# Altium PCB PCB2.PcbDoc
Units mil, origin at the board's own origin, x right, y up, seen from the top; angles counter-clockwise.
Board outline 6000 x 4000 mil, 2 copper layers (Top Layer, Bottom Layer); 69 components, 66 nets, 372 pads, 77 vias.
Unrouted connection lines stored in the file: 2.
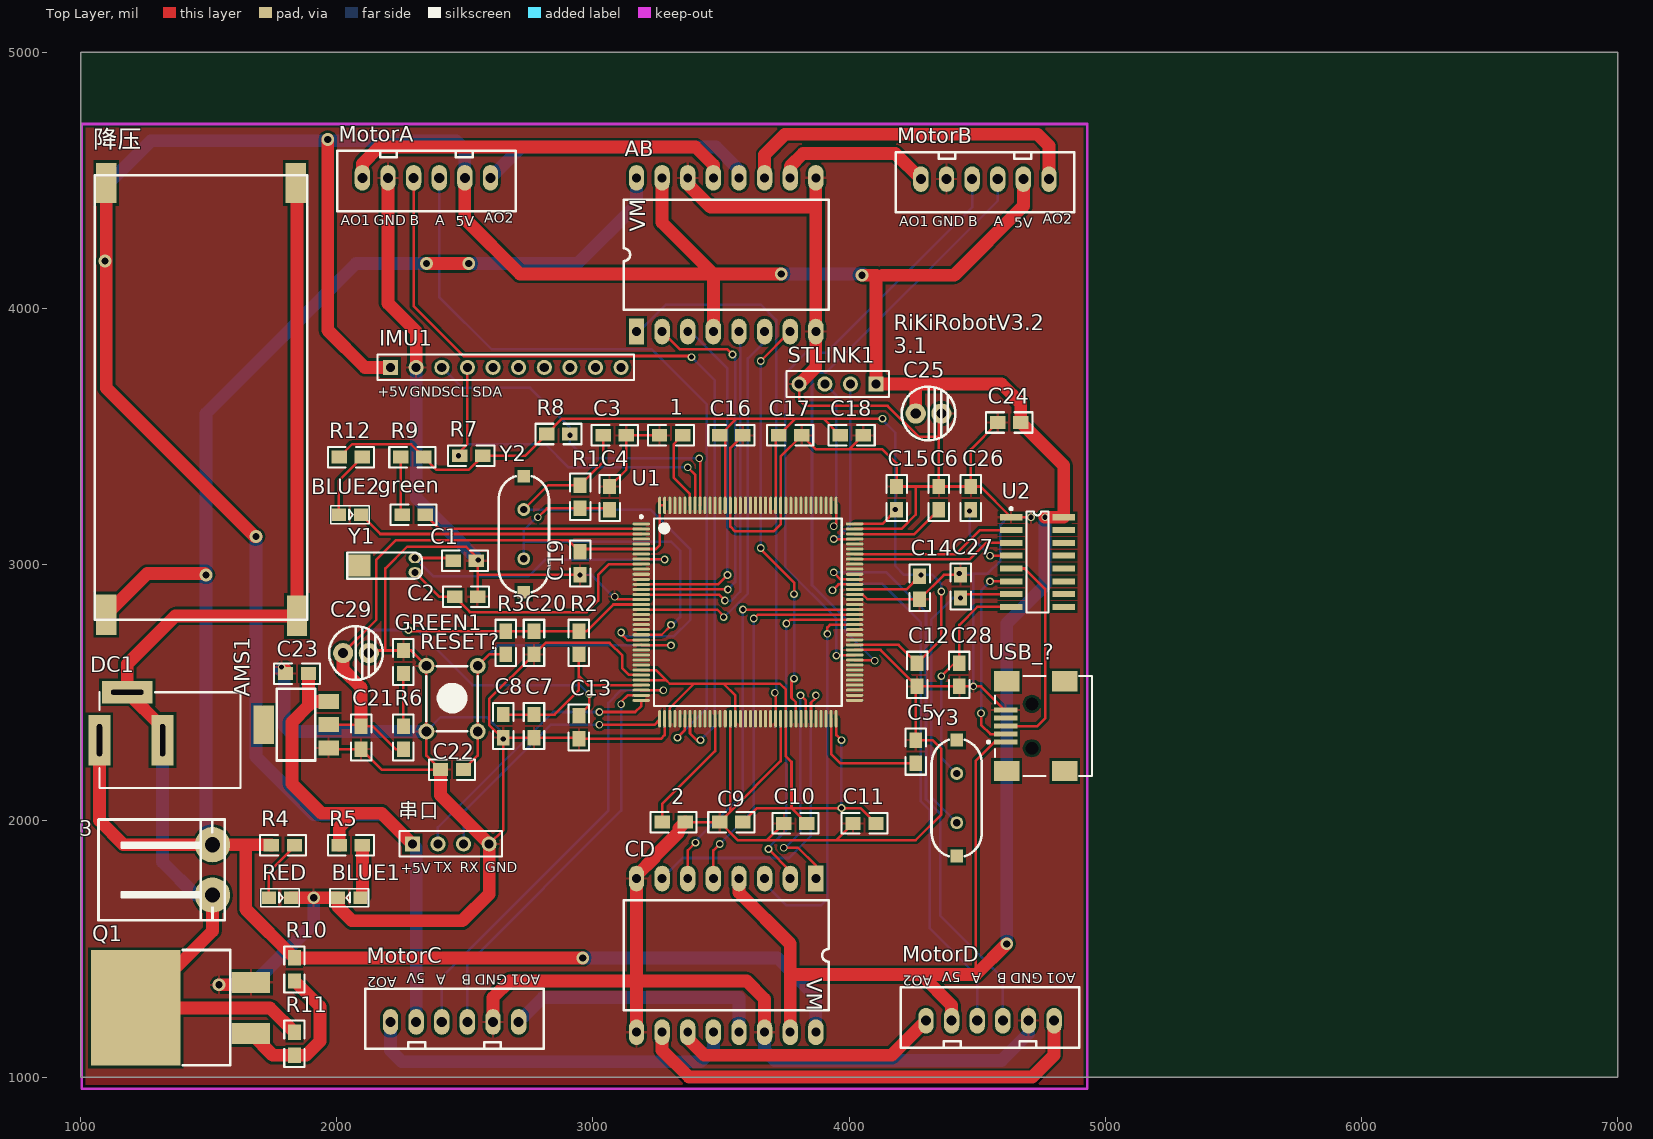
[diagram p0: Top Layer view]
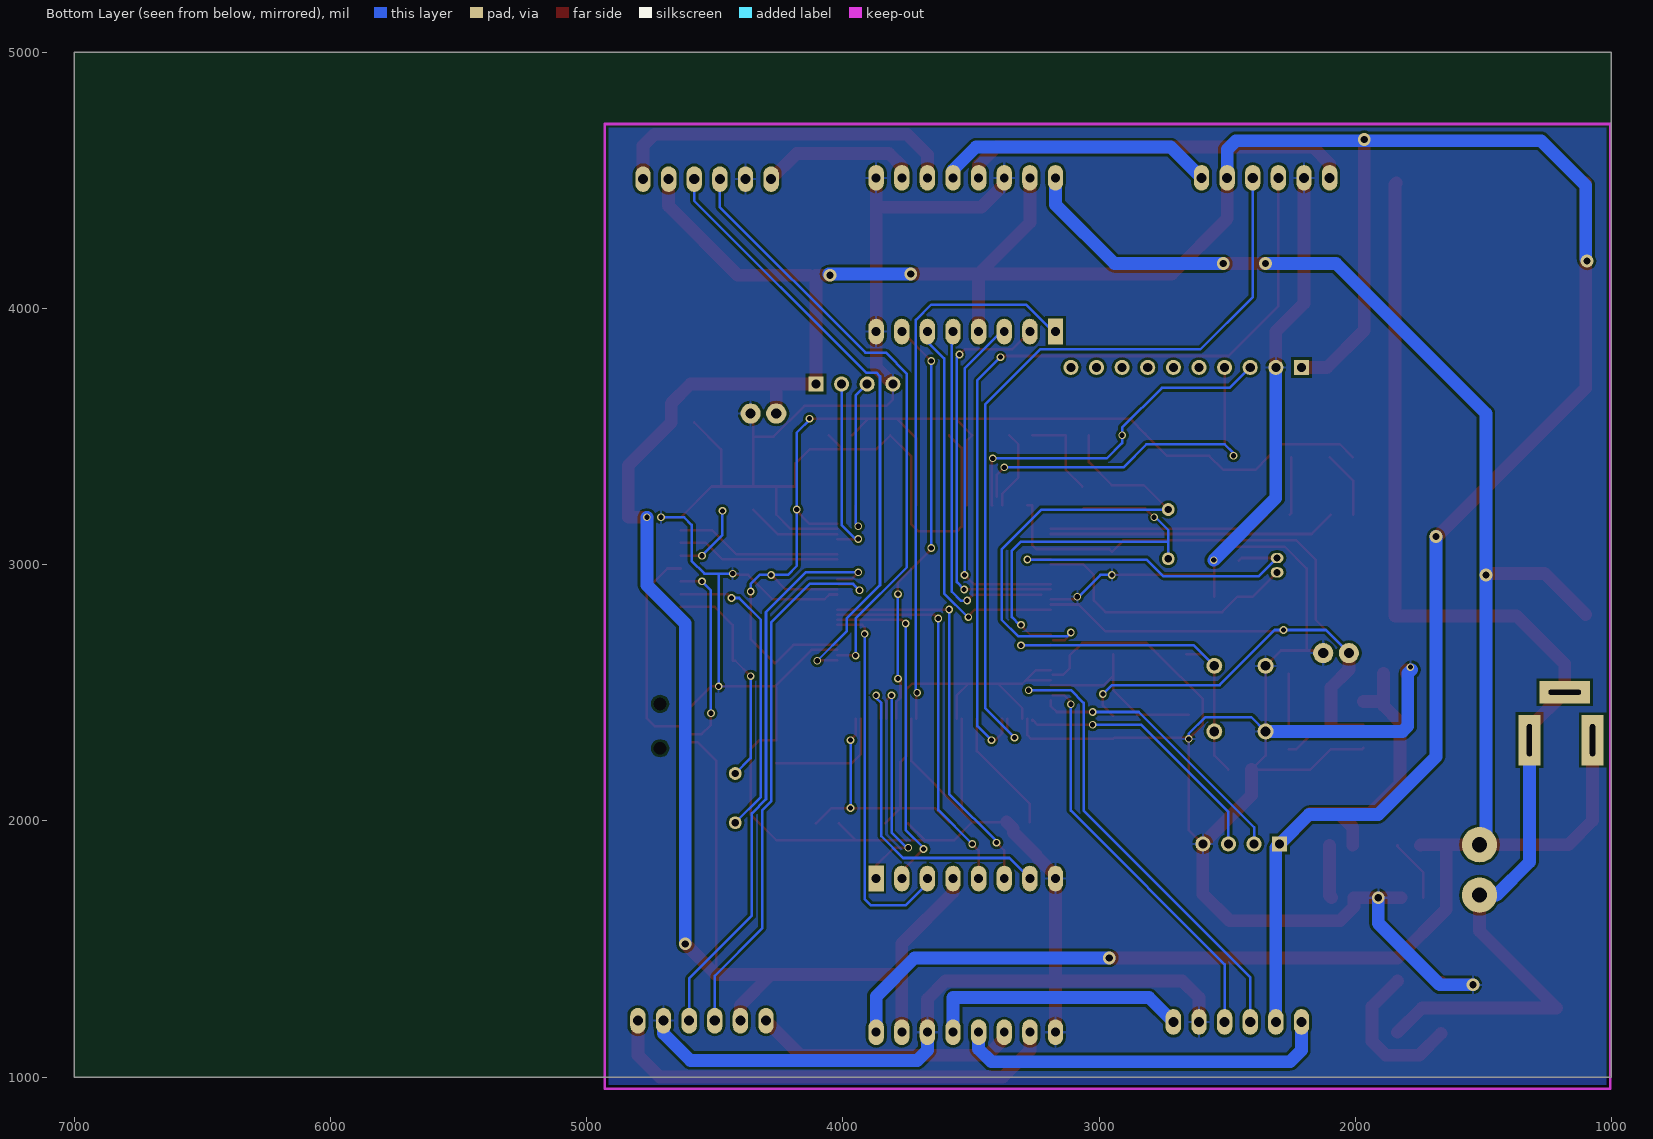
[diagram p1: Bottom Layer view, seen from below]

## Layer stack, top to bottom
Top Solder: solder mask 0.4, Solder Resist, Dk 3.5
Top Layer: signal copper 1.4
Dielectric 1: dielectric 12.6, FR-4, Dk 4.8
Bottom Layer: signal copper 1.4
Bottom Solder: solder mask 0.4, Solder Resist, Dk 3.5

## Board outline
1000,1000 7000,1000 7000,5000 1000,5000

## Design rules (kind name [scope] priority, off if disabled: settings)
Clearance Clearance_1 [InComponent('U1')] p1: gap=0
Clearance [All] p2: gap=10
PolygonConnect [All] p1: connectstyle=Relief reliefconductorwidth=10 reliefentries=4 polygonreliefangle="90 Angle" airgapwidth=10
RoutingVias [All] p1: holewidth=28 width=50 viastyle="Through Hole" minholewidth=28 minwidth=50 maxholewidth=28 maxwidth=50
SolderMaskExpansion [All] p1: expansion=4
Width [All] p1: maxlimit=50 minlimit=50 preferedwidth=50
30 further rules are at their usual default settings.

## Components (designator, comment, footprint, x,y, rotation, side; value= is the part's Value field where it differs from the comment)
1 "10K" 0805 3260,3505 r0 top
2 "10K" 0805 3360,1995 r180 top
3 "Header 2" "KF2EDG - 2" 1515,1906.85 r270 top
AB "TB6612FNG_MOD" 8*8_MOD 3170,3910 r90 top
AMS1 "AMS1117" SOT223 1968.54,2285.12 r90 top
BLUE1 "LED1" SMDLED 2092.04,1699.94 r180 top
BLUE2 "LED1" SMDLED 2007.96,3195.06 r0 top
C1 "10" 0805 2545,3015 r180 top
C2 "10" 0805 2550,2875 r180 top
C3 "22pf" 0805 3130,3505 r180 top
C4 "22pf" 0805 3065,3305 r270 top
C5 "22uf" 0805 4260,2225 r90 top
C6 "22uf" 0805 4350,3215 r90 top
C7 "10uf" 0805 2770,2325 r90 top
C8 "104" 0805 2650,2325 r90 top
C9 "104" 0805 3495,1995 r0 top
C10 "104" 0805 3745,1990 r0 top
C11 "104" 0805 4015,1990 r0 top
C12 "104" 0805 4265,2525 r90 top
C13 "104" 0805 2945,2320 r90 top
C14 "104" 0805 4275,2865 r90 top
C15 "104" 0805 4185,3305 r270 top
C16 "104" 0805 3585,3505 r180 top
C17 "104" 0805 3815,3505 r180 top
C18 "104" 0805 4055,3505 r180 top
C19 "104" 0805 2950,2960 r90 top
C20 "104" 0805 2770,2650 r90 top
C21 "104" 0805 2095,2280 r90 top
C22 "104" 0805 2495,2200 r180 top
C23 "Cap1" 0805 1800,2575 r0 top
C24 "104" 0805 4580,3555 r0 top
C25 "10uF" Cap+ 4260,3590 r0 top
C26 "104" 0805 4475,3305 r270 top
C27 "22p" 0805 4435,2870 r90 top
C28 "22p" 0805 4430,2615 r270 top
C29 "220uF" Cap+ 2025,2655 r0 top
CD "TB6612FNG_MOD" 8*8_MOD 3870,1775 r270 top
DC1 "DC005" DC005 1320.94,2313.74 r180 top
green "LED4" 0805 2255,3195 r0 top
GREEN1 "LED2" 0805 2260,2575 r90 top
IMU1 "Header 10" HDR1X10 2210,3770 r0 top
MotorA "Motor" Motor 2095,4510 r0 top
MotorB "Motor" Motor 4275,4505 r0 top
MotorC "Motor" Motor 2715,1215 r180 top
MotorD "Motor" Motor 4805,1220 r180 top
Q1 "MOS_IRF3205" D2PAK 1213.62,1272.13 r90 top
R1 "1M" 0805 2950,3310 r270 top
R2 "10R" 0805 2945,2650 r90 top
R3 "10K" 0805 2660,2740 r270 top
R4 "10K" 0805 1745,1905 r0 top
R5 "4.7K" 0805 2010,1905 r0 top
R6 "2.4K" 0805 2260,2280 r90 top
R7 "4.7K" 0805 2570,3425 r180 top
R8 "4.7K" 0805 2820,3510 r0 top
R9 "470" 0805 2340,3420 r180 top
R10 "10K" 0805 1835,1465 r270 top
R11 "10K" 0805 1835,1085 r90 top
R12 "470" 0805 2010,3420 r0 top
RED "LED1" SMDLED 1734.97,1700.06 r0 top (schematic designator RED?)
RESET? "KEY_M" KEY_M 2350,2349.09 r90 top
STLINK1 "Header 4" HDR1X4 4105,3705 r180 top
U1 "STM32F407ZET6" LQFP144 3605,2815 r0 top
U2 "CH340G" SOP16M 4735,3010 r270 top
USB_? "USB" USB/SM0.8-6H5 4920,2370 r0 top
Y1 "32.768K" XTAL32 2305,2970 r180 top
Y2 "8MHz" XTAL_US 2730,3022.87 r90 top
Y3 "12MHz" XTAL_US 4420,1992.87 r90 top
串口 "Header 4" HDR1X4 2295,1910 r0 top
降压 "降压模块" 降压模块 1055,2785 r90 top (schematic designator J？)

## Footprints (in the part's own frame and the unit in brackets; to place one, negate y for a bottom-side part, rotate by r counter-clockwise, add the part's x,y. Pads: shape width x height; smd on the part's side, far side on the other; paste and mask are expansions set on the pad)
8*8_MOD [mil]
  rect 100x60 hole 35: 1(0,0)
  oval 100x60 hole 35: 2(0,-100) 3(0,-200) 4(0,-300) 5(0,-400) 6(0,-500) 7(0,-600) 8(0,-700) 9(600,-700) 10(600,-600) 11(600,-500) 12(600,-400) 13(600,-300) 14(600,-200) 15(600,-100) 16(600,0)
  silkscreen extent 85,-750 515,50
0805 [mil]
  rect 60x50 smd: 1(0,0) 2(90,0)
  silkscreen extent -45,-40 135,40
Cap+ [mm]
  round 2 hole 1: 1(0,0) 2(2.54,0)
  silkscreen extent -1.39,-2.67 3.94,2.67
D2PAK [mm]
  rect 2.083x3.81 smd: 1(-2.594,-11.465) 2(2.486,-11.465)
  rect 11.43x8.89 smd: 3(-0.054,-0.035)
  silkscreen extent -5.74,-9.43 5.69,-4.71
DC005 [mm]
  rect 2.2x5 hole 0.5 slot 3.2 at 90 deg: 1(6.274,-0.032) 3(0.024,-0.032)
  rect 5x2.2 hole 0.5 slot 3.2 at 0 deg: 2(3.524,-4.782)
  silkscreen extent -7.73,-4.78 6.27,4.72
HDR1X4 [mm] "Connector; Header; 4 Position"
  rect 1.5x1.5 hole 0.9: 1(0,0)
  round 1.5 hole 0.9: 2(2.54,0) 3(5.08,0) 4(7.62,0)
  silkscreen extent -1.27,-1.27 8.89,1.27
HDR1X10 [mm] "Connector; Header; 10 Position"
  rect 1.5x1.5 hole 0.9: 1(0,0)
  round 1.5 hole 0.9: 2(2.54,0) 3(5.08,0) 4(7.62,0) 5(10.16,0) 6(12.7,0) 7(15.24,0) 8(17.78,0) 9(20.32,0) 10(22.86,0)
  silkscreen extent -1.27,-1.27 24.13,1.27
KEY_M [mil]
  round 62 hole 38: 1(0,0) 1(255.91,0) 2(0,-200) 2(255.91,-200)
  silkscreen extent 0,-200 255,0
"KF2EDG - 2" [mm]
  round 3.5 hole 1.5: 1(0,0) 2(5,0)
  silkscreen extent -2.5,-11.3 7.5,1.2
LQFP144 [mm] "LQFP, 144-Leads, Body 22.2x22.2mm (max), Pitch 0.50mm, IPC Medium Density"
  oval 1.75x0.3 smd: 1(-10.575,8.75) 2(-10.575,8.25) 3(-10.575,7.75) 4(-10.575,7.25) 5(-10.575,6.75) 6(-10.575,6.25) 7(-10.575,5.75) 8(-10.575,5.25) 9(-10.575,4.75) 10(-10.575,4.25) 11(-10.575,3.75) 12(-10.575,3.25) 13(-10.575,2.75) 14(-10.575,2.25) 15(-10.575,1.75) 16(-10.575,1.25) 17(-10.575,0.75) 18(-10.575,0.25) 19(-10.575,-0.25) 20(-10.575,-0.75) 21(-10.575,-1.25) 22(-10.575,-1.75) 23(-10.575,-2.25) 24(-10.575,-2.75) 25(-10.575,-3.25) 26(-10.575,-3.75) 27(-10.575,-4.25) 28(-10.575,-4.75) 29(-10.575,-5.25) 30(-10.575,-5.75) 31(-10.575,-6.25) 32(-10.575,-6.75) 33(-10.575,-7.25) 34(-10.575,-7.75) 35(-10.575,-8.25) 36(-10.575,-8.75) 73(10.575,-8.75) 74(10.575,-8.25) 75(10.575,-7.75) 76(10.575,-7.25) 77(10.575,-6.75) 78(10.575,-6.25) 79(10.575,-5.75) 80(10.575,-5.25) 81(10.575,-4.75) 82(10.575,-4.25) 83(10.575,-3.75) 84(10.575,-3.25) 85(10.575,-2.75) 86(10.575,-2.25) 87(10.575,-1.75) 88(10.575,-1.25) 89(10.575,-0.75) 90(10.575,-0.25) 91(10.575,0.25) 92(10.575,0.75) 93(10.575,1.25) 94(10.575,1.75) 95(10.575,2.25) 96(10.575,2.75) 97(10.575,3.25) 98(10.575,3.75) 99(10.575,4.25) 100(10.575,4.75) 101(10.575,5.25) 102(10.575,5.75) 103(10.575,6.25) 104(10.575,6.75) 105(10.575,7.25) 106(10.575,7.75) 107(10.575,8.25) 108(10.575,8.75)
  oval 0.3x1.75 smd: 37(-8.75,-10.575) 38(-8.25,-10.575) 39(-7.75,-10.575) 40(-7.25,-10.575) 41(-6.75,-10.575) 42(-6.25,-10.575) 43(-5.75,-10.575) 44(-5.25,-10.575) 45(-4.75,-10.575) 46(-4.25,-10.575) 47(-3.75,-10.575) 48(-3.25,-10.575) 49(-2.75,-10.575) 50(-2.25,-10.575) 51(-1.75,-10.575) 52(-1.25,-10.575) 53(-0.75,-10.575) 54(-0.25,-10.575) 55(0.25,-10.575) 56(0.75,-10.575) 57(1.25,-10.575) 58(1.75,-10.575) 59(2.25,-10.575) 60(2.75,-10.575) 61(3.25,-10.575) 62(3.75,-10.575) 63(4.25,-10.575) 64(4.75,-10.575) 65(5.25,-10.575) 66(5.75,-10.575) 67(6.25,-10.575) 68(6.75,-10.575) 69(7.25,-10.575) 70(7.75,-10.575) 71(8.25,-10.575) 72(8.75,-10.575) 109(8.75,10.575) 110(8.25,10.575) 111(7.75,10.575) 112(7.25,10.575) 113(6.75,10.575) 114(6.25,10.575) 115(5.75,10.575) 116(5.25,10.575) 117(4.75,10.575) 118(4.25,10.575) 119(3.75,10.575) 120(3.25,10.575) 121(2.75,10.575) 122(2.25,10.575) 123(1.75,10.575) 124(1.25,10.575) 125(0.75,10.575) 126(0.25,10.575) 127(-0.25,10.575) 128(-0.75,10.575) 129(-1.25,10.575) 130(-1.75,10.575) 131(-2.25,10.575) 132(-2.75,10.575) 133(-3.25,10.575) 134(-3.75,10.575) 135(-4.25,10.575) 136(-4.75,10.575) 137(-5.25,10.575) 138(-5.75,10.575) 139(-6.25,10.575) 140(-6.75,10.575) 141(-7.25,10.575) 142(-7.75,10.575) 143(-8.25,10.575) 144(-8.75,10.575)
  silkscreen extent -10.7,-9.3 9.3,9.57, body extent -10,-10 10,10, height 1.6
Motor [mil]
  oval 60x100 hole 39.37: 1(505,0) 2(405,0) 3(305,0) 4(205,0) 5(105,0) 6(5,0)
  silkscreen extent -93,-130 603,105
SMDLED [mm]
  rect 1.4x1.27 smd: 1(0.001,-0.002) 2(2.211,-0.002)
  silkscreen extent -0.8,-0.89 3.01,0.89
SOP16M [mm]
  rect 0.6x2.2 smd: 1(-4.445,-2.6) 2(-3.175,-2.6) 3(-1.905,-2.6) 4(-0.635,-2.6) 5(0.635,-2.6) 6(1.905,-2.6) 7(3.175,-2.6) 8(4.445,-2.6) 9(4.445,2.6) 10(3.175,2.6) 11(1.905,2.6) 12(0.635,2.6) 13(-0.635,2.6) 14(-1.905,2.6) 15(-3.175,2.6) 16(-4.445,2.6)
  silkscreen extent -5.42,-2.72 5,1.1
SOT223 [mil]
  rect 59x79 smd: 1(0,0) 2(90.55,0) 3(181.1,0)
  rect 150x79 smd: 4(89.88,253.54)
  silkscreen extent -49,52 231,202
USB/SM0.8-6H5 [mm]
  rect 2.3x0.5 smd: 1(-7.85,-1.6) 2(-7.85,-0.8) 3(-7.85,0) 4(-7.85,0.8) 5(-7.85,1.6)
  rect 2.5x2 smd: 6(-7.75,4.45) 7(-1.996,4.45) 8(-7.75,-4.45) 9(-1.996,-4.45)
  round 0.6 hole 1.27 unplated: MH1(-5.25,2.2) MH2(-5.25,-2.2)
  silkscreen extent -9.67,-4.95 0.7,4.95
XTAL32 [mil]
  oval 50x40 hole 28: 1(0,0) 2(0,-56)
  rect 92.13x86 smd: ""(220,-27)
  silkscreen extent -28,-77 264,25
XTAL_US [mil]
  round 50 hole 28: 1(0,0) 2(192.13,0)
  rect 50x50 smd: ""(-130.32,0) ""(322.44,0)
  silkscreen extent -131,-98 323,98
降压模块 [mil]
  rect 157.48x78.74 smd: 1(20,-45) 2(15,-790) 3(1705,-45) 4(1705,-785)
  silkscreen extent 0,-830 1735,0

## Part data
1 2 R1 R2 R3 R4 R5 R6 R7 R8 R9 R10 R11 R12: library part R
3: "Header, 2-Pin"
BLUE1 BLUE2 green RED: library part LED2, "Typical RED, GREEN, YELLOW, AMBER GaAs LED"
C1 C2 C3 C4 C5 C6 C7 C8 C9 C10 C11 C12 C13 C14 C15 C16 C17 C18 C19 C20 C21 C22 C24 C26 C27 C28: library part C
C25 C29: library part CAP
GREEN1: "Typical RED, GREEN, YELLOW, AMBER GaAs LED"
IMU1: "Header, 10-Pin"
STLINK1 串口: "Header, 4-Pin"
U2: "USB2UART"
USB_?: library part USB5
Y1: library part XTAL_1, "Crystal Oscillator"
Y2 Y3: library part XTAL, "Crystal Oscillator"

## Via types
v1: diameter 30, hole 20, Top Layer to Bottom Layer, 65 vias
v2: diameter 50, hole 28, Top Layer to Bottom Layer, 12 vias

## Nets (pads, with @x,y where several pads share a name; then routed paths per layer and width w, separated by ;. In a path a pad name is that pad's centre, name@x,y a point inside that pad or via, vN(x,y) a via of type N, cw(c..) or ccw(c..) an arc to the next point about the centre after c; other vN are vias at no path point)
3.3V: 
5V: 
+3.3V: AMS1.2 C9.2 C10.2 C11.2 C12.2 C13.2 C14.2 C15.2 C16.2 C17.2 C18.2 C19.2 C20.2 C21.2 C29.1 R2.2 R3.1 R6.1 R7.1 R8.1 R9.1 R12.1 U1.6 U1.17 U1.30 U1.32 U1.39 U1.52 U1.62 U1.72 U1.84 U1.95 U1.108 U1.121 U1.131 U1.143 U1.144 | length 12052.5
  Top Layer w10: AMS1.2 2089.33,2375.67 C21.2 2140,2370 2230,2280 R6.1 ; R12.1 2060,3470 2290,3470 R9.1 2390,3370 2515,3370 R7.1 2735,3425 R8.1 2880,3570 3560,3570 ; C29.1 2155,2785 2155,3020 2230,3095 2905,3095 C19.2 2961.06,3061.06 U1.6 3246.06,3061.06 3260.51,3075.51 U1.144 U1.143 ; v1@2280,2740 R3.1 C20.2 R2.2 2975,2740 3079.53,2844.53 U1.17 ; C13.2 2985,2450 v1(2985,2495) ; U1.32@3188.66,2549.57 3285.43,2549.57 ; U1.30 3246.38,2588.62 3285.43,2549.57 ; U1.39 3299.88,2439.88 3395.12,2535.12 ; U1.131@3516.1,3231.34 3516.1,3483.9 C16.2 3560,3570 ; U1.52@3556.1,2398.66 3556.1,2488.9 3509.88,2535.12 ; C9.2 3640,2050 3775,2050 ; U1.121 3713.27,3493.27 C17.2 3790,3570 ; C10.2 3775,2050 ; U1.72@3949.8,2398.66 3949.8,2335.2 v1(3970,2315) ; C18.2 3900,3570 ; U1.84 4192.95,2687.05 C12.2 4360,2710 v1(4360,2895) v1@4360,2900 ; U1.95 4223.58,2903.58 C14.2 ; U1.108 4129.49,3159.49 C15.2 ; C11.2 4045,2050 3775,2050 ; v1(4130,3570) 3900,3570 ; 3285.43,2549.57 3299.88,2535.12 3395.12,2535.12 ; 3395.12,2535.12 3509.88,2535.12 ; 3509.88,2535.12 3729.88,2535.12 3752.95,2512.05 3752.95,2252.05 3775,2230 3775,2050 ; 3560,3570 3790,3570 ; 3790,3570 3900,3570
  Top Layer w50: C29.1 2025,2590 2095,2520 C21.2
  Bottom Layer w10: C29.1 2115,2745 v1(2280,2745) 2315,2745 2530,2530 2950,2530 v1(2985,2495) ; v1(3970,2050) v1(3970,2315) ; v1@4125,3570 4180,3515 v1(4180,3215) ; v1@4180,3210 4180,2995 4215,2960 v1(4280,2960) ; v1@4285,2960 4325,2960 4360,2925 v1(4360,2895)
+5V: AB.4 AB.15 AMS1.3 C23.2 C24.2 C25.1 CD.4 CD.15 IMU1.1 MotorA.2 MotorB.2 MotorC.2 MotorD.2 R5.1 STLINK1.1 U2.16 USB_?.1 串口.1 降压.3 | length 17677.4
  Top Layer w10: 4495,1400 4495,2235 4567.01,2307.01 USB_?.1
  Top Layer w50: 降压.3 1100,3690 1680,3110 v2(1685,3110) ; C23.2 1890,2450 ; v2(1965,4660) 1965,3915 2110,3770 IMU1.1 ; AMS1.3 1906.22,2466.22 1890,2450 ; R5.1 2010,1975 2065,2030 ; 串口.1 2175,2030 2065,2030 ; MotorA.2 2500,4350 2715,4135 3470,4135 ; AB.15 3270,4335 3470,4135 ; AB.4 3470,4135 ; CD.4 3570,1720 3770,1520 3770,1400 ; v2(3735,4135) 3470,4135 ; CD.15 3770,1400 ; v2(4050,4130) 4105,4130 STLINK1.1 4270,3705 ; 4130,4130 4410,4130 4680,4400 MotorB.2 ; C25.1 4260,3695 4270,3705 ; MotorD.2 4400,1280 4280,1400 ; v2(4615,1520) 4495,1400 4280,1400 ; v1(4765,3185) U2.16 4837.36,3387.64 C24.2 4670,3630 4595,3705 4270,3705 ; 1890,2450 1825,2385 1825,2145 1940,2030 2065,2030 ; 3770,1400 4280,1400
  Bottom Layer w50: v2@1100,4195 1100,4480 1275,4655 2465,4655 2500,4620 MotorA.2 ; v2(1685,3110) 1685,2250 1910,2025 2180,2025 串口.1 2310,1895 MotorC.2 ; v2(3735,4135) v2@4055,4135 ; v2(4615,1520) 4615,2770 4765,2920 v1(4765,3185)
  other v2: 1095,4185
AIN1: AB.3 U1.13 | length 1371.6
  Top Layer w10: U1.13 3488.27,2923.27 v1(3525,2960)
  Bottom Layer w10: AB.3 3380,3910 3525,3765 v1(3525,2960)
AIN2: AB.2 U1.14 | length 1582.9
  Top Layer w10: U1.14@3188.66,2903.27 v1(3526.73,2903.27) ; AB.2 3340,3840 3525,3840 v1(3545,3820)
  Bottom Layer w10: v1(3526.73,2903.27) 3555,2931.54 3555,3810 v1(3545,3820)
AO1: AB.13 MotorA.6 | length 1530.9
  Top Layer w50: MotorA.6 2100,4565 2165,4630 3400,4630 3470,4560 AB.13
AO2: AB.12 MotorA.1 | length 1087
  Bottom Layer w50: MotorA.1 2720,4630 3480,4630 3570,4540 AB.12
BIN1: AB.5 U1.15 | length 1391.2
  Top Layer w10: 3225,2883.27 3491.73,2883.27 v1(3515,2860)
  Bottom Layer w10: v1(3515,2860) 3540,2860 3575,2895 3575,3905 AB.5
BIN2: AB.6 U1.18 | length 1519.5
  Top Layer w10: U1.18@3188.66,2824.53 3196.95,2824.53 3197.26,2824.84 3485.16,2824.84 3510,2800 v1(3510,2795)
  Bottom Layer w10: v1(3510,2795) 3512.57,2795 3605,2887.43 3605,3805 3670,3870 AB.6
BO1: AB.10 MotorB.6 | length 617.1
  Top Layer w50: AB.10 3770,4555 3820,4605 4180,4605 MotorB.6
BO2: AB.11 MotorB.1 | length 1381.8
  Top Layer w50: AB.11 3670,4600 3750,4680 4735,4680 4780,4635 MotorB.1
BOOT0: 1.2 U1.138 | length 314.5
  Top Layer w10: 1.2 3315,3470 3315,3340 3378.62,3276.38 U1.138
BOOT1: 2.2 U1.48 | length 489.4
  Top Layer w10: 2.2 3270,2065 3477.05,2272.05 U1.48
CIN1: CD.3 U1.88 | length 1480.8
  Top Layer w10: v1(3915,2730) 3915,2754.68 3925.16,2764.84 U1.88@4021.34,2764.84
  Bottom Layer w10: CD.3 3670,1755 3755,1670 3890,1670 3915,1695 3915,2635 v1(3915,2730)
CIN2: CD.2 U1.89 | length 1326.7
  Top Layer w10: v1(3685,1890) 3770,1805 CD.2 ; v1(3755,2770) 3769.84,2784.84 U1.89@4021.34,2784.84
  Bottom Layer w10: v1@3685,1895 3755,1965 v1(3755,2770)
CO1: CD.13 MotorC.6 | length 1034.4
  Bottom Layer w50: MotorC.6 2805,1310 3570,1310 CD.13
CO2: CD.12 MotorC.1 | length 1474.4
  Bottom Layer w50: MotorC.1 2210,1105 2255,1060 3420,1060 3470,1110 CD.12
DIN1: CD.5 U1.90 | length 1480.2
  Top Layer w10: CD.5 3470,1885 v1(3495,1910) ; v1(3627.5,2790) 3630,2790 3644.84,2804.84 U1.90@4021.34,2804.84
  Bottom Layer w10: v1(3495,1910) 3627.5,2042.5 v1(3627.5,2790)
DIN2: CD.6 U1.91 | length 1582.5
  Top Layer w10: CD.6 3370,1885 v1(3400,1915) ; v1@3580,2825 3580.16,2824.84 U1.91
  Bottom Layer w10: v1@3395,1915 3585,2105 v1(3585,2825)
DO1: CD.10 MotorD.6 | length 1813.7
  Top Layer w50: CD.10 3270,1105 3375,1000 4715,1000 4800,1085 MotorD.6
DO2: CD.11 MotorD.1 | length 1037.8
  Top Layer w50: CD.11 3370,1150 3435,1085 4165,1085 MotorD.1
GND: 1.1 2.1 AB.8 AB.9 AB.14 AMS1.1 BLUE1.2 C1.1 C2.1 C3.1 C4.1 C5.2 C6.2 C7.1 C8.1 C9.1 C10.1 C11.1 C12.1 C13.1 C14.1 C15.1 C16.1 C17.1 C18.1 C19.1 C20.1 C21.1 C22.2 C23.1 C24.1 C25.2 C26.1 C27.2 C28.2 C29.2 CD.8 CD.9 CD.14 GREEN1.2 IMU1.2 MotorA.5 MotorB.5 MotorC.5 MotorD.5 Q1.2 RED.2 RESET?.1 STLINK1.4 U1.16 U1.31 U1.38 U1.51 U1.61 U1.83 U1.94 U1.107 U1.120 U1.130 U2.1 USB_?.5 串口.4 | length 23432.5
  Top Layer w10: AMS1.1 1973.66,2280 C21.1 2175,2200 C22.2 2350,2255 2350,2349.09 2350,2605 2290,2665 GREEN1.2 2190,2665 ; C29.2 2135,2665 2190,2665 ; C2.1 2550,2965 ; 串口.4 2650,1965 v1(2650,2320) 2595,2375 2595,2475 C20.1 2815,2695 3065,2695 3115,2645 3115,2595 3140,2570 U1.31@3180,2570 ; C8.1 C7.1 2940,2325 C13.1 3265,2320 3280.2,2335.2 3280.2,2390.06 3279.88,2390.38 U1.38@3279.88,2398.66 ; v1(2950,2960) 2555,2960 2550,2965 ; C4.1 3130,3370 C3.1 1.1 ; v1(3085,2875) 3095.47,2864.53 U1.16@3188.66,2864.53 ; 2.1 C9.1 ; U1.51 3536.1,2036.1 ; C16.1 3536.1,3456.1 U1.130 3536.1,3148.9 3555,3130 3705,3130 3733.27,3158.27 3733.27,3423.27 C17.1 3870,3450 4000,3450 ; U1.61 3732.95,2232.95 3536.1,2036.1 ; C10.1 3680,1925 ; STLINK1.4 3805,3645 3830,3620 4150,3620 4270,3500 4350,3500 ; C11.1 3950,1925 ; U1.83@4021.34,2667.05 4122.95,2667.05 C12.1 ; U1.94@4021.34,2883.58 4052.32,2883.58 4070.91,2865 C14.1 4370,2960 C27.2 ; U1.107@4021.34,3139.49 4204.49,3139.49 4260,3195 4260,3305 ; C18.1 4000,3450 ; C25.2 4350,3580 4350,3500 ; C24.1 4475,3450 C26.1 ; USB_?.5 4607.01,2432.99 4515,2525 C28.2 C12.1 ; v1(4710,3185) U2.1 4512.64,3305 C26.1 ; 2190,2665 2190,2985 2275,3070 2505,3070 2545,3030 C1.1 2550,3010 2550,2965 ; C9.1 3536.1,2036.1 ; C9.1 3565,1925 3680,1925 ; 3680,1925 3950,1925 ; 3950,1925 4260,1925 4360,2025 4360,2280 4325,2315 C5.2 4260,2520 C12.1 ; 4000,3450 4130,3450 4185,3395 C15.1 4260,3305 ; 4260,3305 C6.2 ; C6.2 C26.1 ; C6.2 4350,3500
  Top Layer w50: v2(1540,1360) 1655,1360 Q1.2 ; C23.1 C23.1@1800,2590 ; RED.2 v2(1910,1700) BLUE1.2 2005,1665 2060,1610 2490,1610 2595,1715 串口.4 2405,2100 C22.2 ; MotorA.5 2200,4020 2310,3910 IMU1.2 ; MotorC.5 2610,1310 2675,1375 3170,1375 ; CD.9 3170,1375 ; 2.1 3335,1970 3335,1955.5 3243.08,1863.58 3243.08,1860 3170,1786.92 CD.8 3170,1375 ; AB.14 3370,4485 3460,4395 3870,4395 ; CD.14 3670,1305 3600,1375 3170,1375 ; STLINK1.4 3870,3770 AB.8 3870,4395 ; AB.9 3870,4395
  Bottom Layer w10: RESET?.1@2350,2349.09 2405.91,2405 2585,2405 2650,2340 v1(2650,2320) ; v1(2950,2960) 2995,2960 v1@3085,2870 ; v1(4430,2965) 4485,2965 ; v1(4485,2525) 4485,2965 ; v1(4710,3185) 4620,3185 4590,3155 4590,3015 4540,2965 4485,2965
  Bottom Layer w50: v2(1540,1360) 1670,1360 1910,1600 v2(1910,1700) ; v1@1780,2590 1795,2575 1795,2370 1815.91,2349.09 RESET?.1@2350,2349.09 ; IMU1.2 2310,3260 v1(2552.5,3017.5) ; CD.14 3670,1105 3710,1065 4595,1065 4700,1170 MotorD.5
  other v1: 1785,2600
I2C1_SCL: IMU1.3 R8.2 U1.136 | length 1372.6
  Top Layer w10: v1(3415,3415) 3418.62,3411.38 3418.62,3231.97 U1.136
  Bottom Layer w10: IMU1.3 2490,3690 2755,3690 2910,3535 v1(2910,3505) 2910,3475 2970,3415 v1(3415,3415)
I2C1_SDA: IMU1.4 R7.2 U1.137 | length 1441.1
  Top Layer w10: R7.2 2480,3440 2510,3470 IMU1.4 ; v1(3370,3380) 3398.62,3351.38 U1.137@3398.62,3265
  Bottom Layer w10: v1(2475,3425) 2475,3435 2510,3470 2815,3470 2905,3380 v1(3370,3380)
LED1: green.2 U1.2 | length 866.5
  Top Layer w10: green.2 2400.2,3139.8 U1.2
LED2: BLUE2.2 U1.3 | length 1124.8
  Top Layer w10: BLUE2.2 2170.2,3119.8 U1.3@3188.66,3119.8
NetBLUE1_1: BLUE1.1 R5.2 | length 208.3
  Top Layer w50: BLUE1.1 2100,1707.99 R5.2
NetBLUE2_1: BLUE2.1 R12.2 | length 263.1
  Top Layer w10: BLUE2.1 2007.99,3327.99 R12.2
NetC1_2: C1.2 U1.8 Y1.2 | length 1267.9
  Top Layer w10: Y1.2 2444,3026 C1.2 ; U1.8 3268.31,3021.69 v1@3270,3020
  Bottom Layer w10: Y1.2 2376,2955 2750,2955 2815,3020 v1(3280,3020)
NetC2_2: C2.2 U1.9 Y1.1 | length 1084
  Top Layer w10: Y1.1 2400,2875 C2.2 2520,2815 2975,2815 3020,2860 3020,2960 3062.01,3002.01 3180.06,3002.01 3180.38,3001.69 U1.9@3188.66,3001.69
NetC3_2: C3.2 R1.1 U1.24 Y2.2 | length 1868.3
  Top Layer w10: Y2.2 2825,3310 R1.1 3040,3400 C3.2 ; v1(3110,2735) 3110,2730 3135,2705 U1.24@3179,2705
  Bottom Layer w10: Y2.2 3225,3215 3380,3060 3380,2785 3315,2720 3125,2720 v1(3110,2735)
NetC4_2: C4.2 R1.2 U1.23 Y2.1 | length 1544.9
  Top Layer w10: v1(2785,3185) 2820,3220 R1.2 3060,3220 C4.2 ; U1.23 3268.58,2726.42 3305,2762.83 v1(3305,2765)
  Bottom Layer w10: Y2.1 2730,3090 ; v1@2780,3185 2730,3135 2730,3090 ; v1(3305,2765) 3310,2765 3340,2795 3340,3055 3305,3090 2730,3090
NetC5_1: C5.1 U1.71 | length 483.2
  Top Layer w10: U1.71 3929.8,2260.2 3965,2225 C5.1
NetC6_1: C6.1 U1.106 | length 368.2
  Top Layer w10: U1.106@4021.34,3119.49 4254.49,3119.49 C6.1
NetC7_2: C7.2 C8.2 R2.1 U1.33 | length 732.7
  Top Layer w10: C8.2 C7.2 2850,2415 2945,2510 2945,2565 ; R2.1 2945,2565 ; U1.33 2980.43,2529.57 2945,2565
NetC26_2: C26.2 U2.4 | length 290.8
  Top Layer w10: v1(4550,3035) U2.4
  Bottom Layer w10: v1(4470,3210) 4470,3115 v1(4550,3035)
NetC27_1: C27.1 U2.7 Y3.1 | length 1187.6
  Top Layer w10: v1(4435,2870) 4450,2885 U2.7
  Bottom Layer w10: Y3.1 4320,2092.87 4320,2785 4405,2870 v1(4435,2870)
NetC28_1: C28.1 U2.8 Y3.2 | length 866.3
  Top Layer w10: v1(4360,2565) 4420,2625 4430,2625 4430,2765 4500,2835 U2.8
  Bottom Layer w10: v1@4360,2560 4360,2245 Y3.2
NetGREEN1_1: GREEN1.1 R6.2 | length 205
  Top Layer w10: R6.2 GREEN1.1
Netgreen_1: green.1 R9.2 | length 227.1
  Top Layer w10: R9.2 2250,3200 green.1
NetQ1_1: Q1.1 R10.2 R11.1 | length 604.4
  Top Layer w50: Q1.1 1750,1085 R11.1 1880,1085 1935,1140 1935,1275 R10.2
NetR4_2: R4.2 RED.1 | length 246.4
  Top Layer w10: RED.1 1735,1800 1835,1900 R4.2
NetU2_5: U2.5 USB_?.3 | length 837
  Top Layer w10: USB_?.3 4735,2370 4765,2400 4765,2905 4685,2985 U2.5
NetU2_6: U2.6 USB_?.2 | length 768.2
  Top Layer w10: v1(4515,2420) 4515,2375 4551.5,2338.5 USB_?.2 ; v1(4550,2935) U2.6
  Bottom Layer w10: v1(4515,2420) 4515,2900 v1(4550,2935)
PWMA: AB.1 U1.60 | length 2173
  Top Layer w10: v1(3710,2500) 3712.95,2497.05 U1.60@3712.95,2398.66
  Bottom Layer w10: AB.1 3180,3910 3285,4015 3655,4015 3715,3955 3715,2505 v1(3710,2500)
PWMB: AB.7 U1.64 | length 1626.1
  Top Layer w10: v1@3650,3065 3785,2930 v1(3785,2885) ; v1(3655,3795) AB.7 ; v1(3785,2555) 3775,2545 3775,2480 3792.01,2462.99 U1.64
  Bottom Layer w10: v1(3655,3065) v1(3655,3795) ; v1(3785,2555) v1(3785,2885)
PWMC: CD.1 U1.66 | length 931
  Top Layer w10: v1(3745,1895) 3800,1895 3870,1825 CD.1 ; v1(3810,2490) 3831.06,2468.94 U1.66@3831.06,2398.66
  Bottom Layer w10: v1@3745,1890 3810,1955 v1(3810,2490)
PWMD: CD.7 U1.67 | length 1305.8
  Top Layer w10: U1.67 3851.06,2461.06 3870,2480 v1(3870,2490)
  Bottom Layer w10: CD.7 3350,1855 3765,1855 3850,1940 3850,2460 3870,2480 v1(3870,2490)
RESET: C22.1 R3.2 RESET?.2 U1.25 | length 1461.7
  Top Layer w10: C22.1 2550,2255 2550,2349.09 2550,2605 2595,2650 R3.2 ; U1.25 3190.71,2685 v1(3305,2685)
  Bottom Layer w10: RESET?.2@2550,2605 2630,2685 v1(3305,2685)
SWCLK: STLINK1.3 U1.109 | length 663.5
  Top Layer w10: v1@3938.98,3150 3949.49,3160.51 U1.109
  Bottom Layer w10: STLINK1.3 3950,3660 3950,3160 v1(3940,3150)
SWDIO: STLINK1.2 U1.105 | length 719.3
  Top Layer w10: v1(3940,3100) 3940.51,3099.49 U1.105@4021.34,3099.49
  Bottom Layer w10: v1(3940,3100) 3950,3100 4005,3155 STLINK1.2
TIM3_CH1: MotorA.3 U1.42 | length 3117.3
  Top Layer w10: v1(3330,2325) 3358.94,2353.94 U1.42
  Bottom Layer w10: MotorA.3 2400,4045 2605,3840 3230,3840 3445,3625 3445,2440 v1(3330,2325)
TIM3_CH2: MotorA.4 U1.43 | length 3325.3
  Top Layer w10: MotorA.4 2300,4010 2495.47,3814.53 3380.47,3814.53 v1(3385,3810) ; U1.43@3378.94,2398.66 3378.94,2341.06 3405,2315 v1(3420,2315)
  Bottom Layer w10: v1@3390,3805 3475,3720 3475,2370 v1(3420,2315)
TIM4_CH1: MotorB.3 U1.81 | length 2384.7
  Top Layer w10: U1.81@4021.34,2627.05 4097.95,2627.05 v1(4100,2625)
  Bottom Layer w10: v1(4100,2625) 3985,2740 3985,2790 3855,2920 3855,3735 3869.53,3749.53 3909.53,3749.53 4580,4420 MotorB.3
TIM4_CH2: MotorB.4 U1.82 | length 2364.3
  Top Layer w10: v1(3950,2645) 3952.05,2647.05 U1.82@4021.34,2647.05
  Bottom Layer w10: v1(3950,2645) 3950,2790 3750,2990 3750,3745 3832.5,3827.5 3912.5,3827.5 4480,4395 MotorB.4
TIM5_CH1: MotorC.3 U1.34 | length 1836.5
  Top Layer w10: U1.34@3188.66,2509.57 3274.57,2509.57 v1(3275,2510)
  Bottom Layer w10: MotorC.3 2410,1390 3060,2040 3060,2460 3110,2510 v1(3275,2510)
TIM5_CH2: MotorC.4 U1.35 | length 1578.9
  Top Layer w10: v1(3110,2455) 3110,2465 3135.2,2490.2 3179.75,2490.2 U1.35@3179.9,2490.04
  Bottom Layer w10: MotorC.4 2510,1440 3110,2040 v1(3110,2455)
TIM8_CH1: MotorD.3 U1.96 | length 2153.1
  Top Layer w10: v1(3935,2900) 3957.95,2922.95 U1.96@4015,2922.95
  Bottom Layer w10: v1(3935,2900) 3960,2925 4130,2925 4280,2775 4280,2076.31 4315,2041.31 4315,1580 4500,1395 MotorD.3
TIM8_CH2: MotorD.4 U1.97 | length 2236
  Top Layer w10: v1(3940,2970) 3967.05,2942.95 U1.97
  Bottom Layer w10: v1(3940,2970) 4145,2970 4300,2815 4300,2084.59 4355,2029.59 4355,1630 4600,1385 MotorD.4
U1_RX: U1.102 U2.2 | length 650.1
  Top Layer w10: U1.102 4416.38,3041.38 4510,3135 U2.2
U1_TX: U1.101 U2.3 | length 637.7
  Top Layer w10: U1.101@4021.34,3021.38 4471.38,3021.38 4535,3085 U2.3
U2_RX: U1.37 串口.3 | length 1043.8
  Top Layer w10: v1(3025,2375) 3240,2375 3259.88,2394.88 U1.37@3259.88,2390.06
  Bottom Layer w10: 串口.3 2495,2035 2835,2375 v1(3025,2375)
U2_TX: U1.36 串口.2 | length 1076.7
  Top Layer w10: v1(3025,2425) 3165,2425 3188.66,2448.66 U1.36
  Bottom Layer w10: 串口.2 2395,1975 2845,2425 v1(3025,2425)
VBAT+: 3.1 AB.16 CD.16 DC1.1 R4.1 R10.1 降压.1 | length 8049.8
  Top Layer w50: DC1.1 1073.94,2001.06 1168.15,1906.85 3.1 1645,1906.85 ; 降压.1 1260,2965 v2@1485,2965 ; R4.1 1743.15,1906.85 1645,1906.85 ; v2(2350,4175) v2(2515,4175) ; v2(2960,1465) R10.1 1645,1655 1645,1906.85
  Bottom Layer w50: 3.1 1490,1931.85 v2(1490,2960) 1490,3590 2075,4175 v2(2350,4175) ; v2(2515,4175) 2940,4175 3170,4405 AB.16 ; v2(2960,1465) 3720,1465 3870,1315 CD.16
VGND: 3.2 DC1.2 DC1.3 Q1.3 R11.2 降压.2 降压.4 | length 4734.4
  Top Layer w50: DC1.3 1320,2364.21 DC1.2 1182.2,2612.2 1370,2800 降压.2 1845,4485 降压.4 ; 3.2 1515,1570 Q1.3 1740,1270 R11.2
  Bottom Layer w50: DC1.3 1320,1840 1450,1710 3.2
pads on no net: AMS1.4 IMU1.5 IMU1.6 IMU1.7 IMU1.8 IMU1.9 IMU1.10 U1.1 U1.4 U1.5 U1.7 U1.10 U1.11 U1.12 U1.19 U1.20 U1.21 U1.22 U1.26 U1.27 U1.28 U1.29 U1.40 U1.41 U1.44 U1.45 U1.46 U1.47 U1.49 U1.50 U1.53 U1.54 U1.55 U1.56 U1.57 U1.58 U1.59 U1.63 U1.65 U1.68 U1.69 U1.70 U1.73 U1.74 U1.75 U1.76 U1.77 U1.78 U1.79 U1.80 U1.85 U1.86 U1.87 U1.92 U1.93 U1.98 U1.99 U1.100 U1.103 U1.104 U1.110 U1.111 U1.112 U1.113 U1.114 U1.115 U1.116 U1.117 U1.118 U1.119 U1.122 U1.123 U1.124 U1.125 U1.126 U1.127 U1.128 U1.129 U1.132 U1.133 U1.134 U1.135 U1.139 U1.140 U1.141 U1.142 U2.9 U2.10 U2.11 U2.12 U2.13 U2.14 U2.15 USB_?.4 USB_?.6 USB_?.7 USB_?.8 USB_?.9 USB_?.MH1 USB_?.MH2 Y1. Y2. Y3.

## Polygon pours and split planes (outlines as drawn)
GND on Bottom Layer "Bottom Layer-No Net" (solid, pour order 0): 1005,4720 4930,4720 4930,955 1005,955
GND on Top Layer "Bottom Layer-No Net" (solid, pour order 2): 1005,4720 4930,4720 4930,955 1005,955

## Keep-outs
Keep-Out Layer:
  lines w10: 1005,955 1005,4720 4930,4720 4930,4705 4930,955 1005,955

## Silkscreen, mask and mechanical layers (free items; w line width, h text height)
Top Overlay:
  text "RiKiRobotV3.2 / 3.1" at 4175,3825 h60
  text "+5V" at 2160,3655 h40
  text "GND" at 2285,3655 h40
  text "SCL" at 2410,3655 h40
  text "SDA" at 2530,3655 h40
  text "TX" at 2380,1800 h40
  text "RX" at 2480,1800 h40
  text "GND" at 2580,1800 h40
  text "+5V" at 2250,1795 h40

## Text inside footprints (layer, text, board x,y; h text height)
AB: Top Overlay "VM" at 3205,4300 h60 r90
CD: Top Overlay "VM" at 3835,1385 h60 r270
MotorA: Top Overlay "AO1" at 2015,4325 h40; Top Overlay "AO2" at 2575,4335 h40; Top Overlay "B" at 2285,4325 h40; Top Overlay "A" at 2385,4325 h40; Top Overlay "5V" at 2465,4320 h40; Top Overlay "GND" at 2145,4325 h40
MotorB: Top Overlay "AO1" at 4195,4320 h40; Top Overlay "AO2" at 4755,4330 h40; Top Overlay "B" at 4465,4320 h40; Top Overlay "A" at 4565,4320 h40; Top Overlay "5V" at 4645,4315 h40; Top Overlay "GND" at 4325,4320 h40
MotorC: Top Overlay "AO1" at 2795,1400 h40 r180; Top Overlay "AO2" at 2235,1390 h40 r180; Top Overlay "B" at 2525,1400 h40 r180; Top Overlay "A" at 2425,1400 h40 r180; Top Overlay "5V" at 2345,1405 h40 r180; Top Overlay "GND" at 2665,1400 h40 r180
MotorD: Top Overlay "AO1" at 4885,1405 h40 r180; Top Overlay "AO2" at 4325,1395 h40 r180; Top Overlay "B" at 4615,1405 h40 r180; Top Overlay "A" at 4515,1405 h40 r180; Top Overlay "5V" at 4435,1410 h40 r180; Top Overlay "GND" at 4755,1405 h40 r180